# Altium PCB STM32_demo.PcbDoc
Units mil, origin at the board's own origin, x right, y up, seen from the top; angles counter-clockwise.
Board outline 2200 x 1030 mil, 2 copper layers (Top Layer, Bottom Layer); 35 components, 50 nets, 171 pads, 34 vias.
Unrouted connection lines stored in the file: 1.
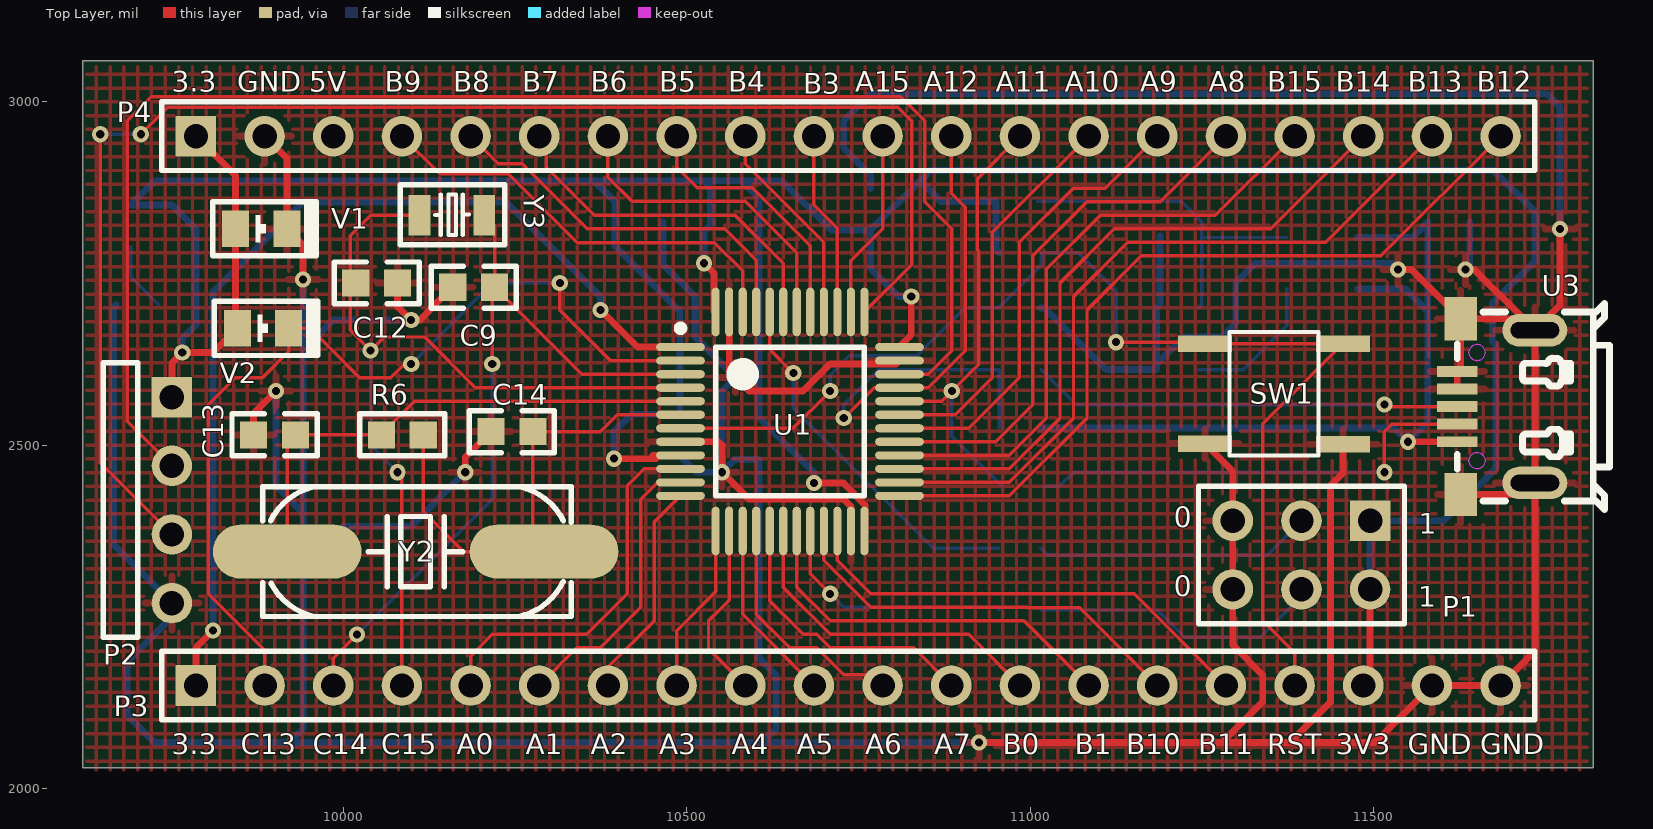
[diagram p0: Top Layer view]
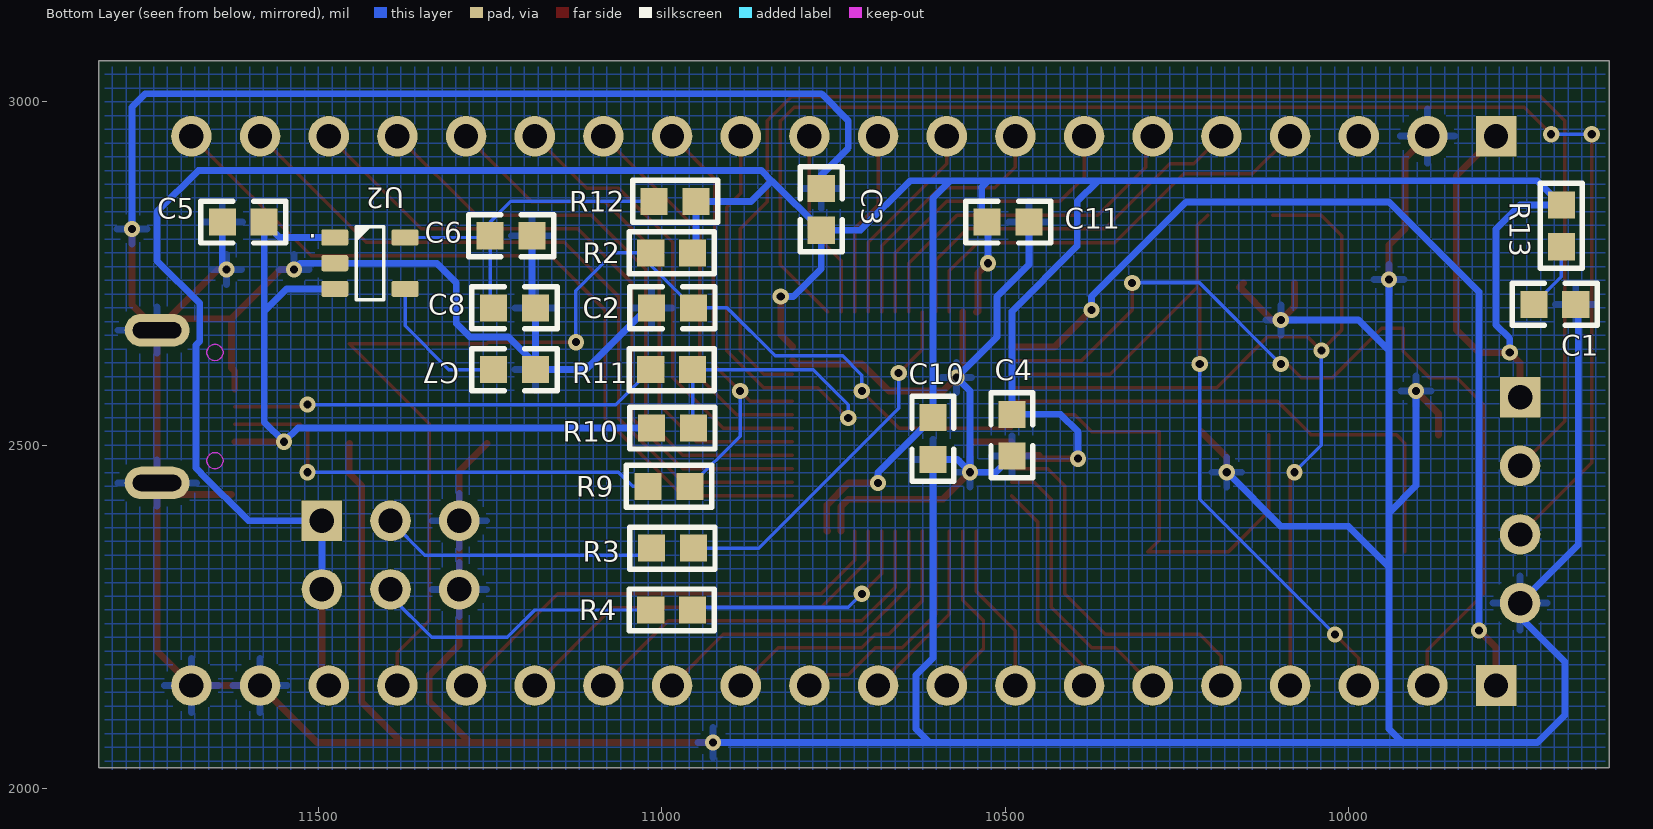
[diagram p1: Bottom Layer view, seen from below]
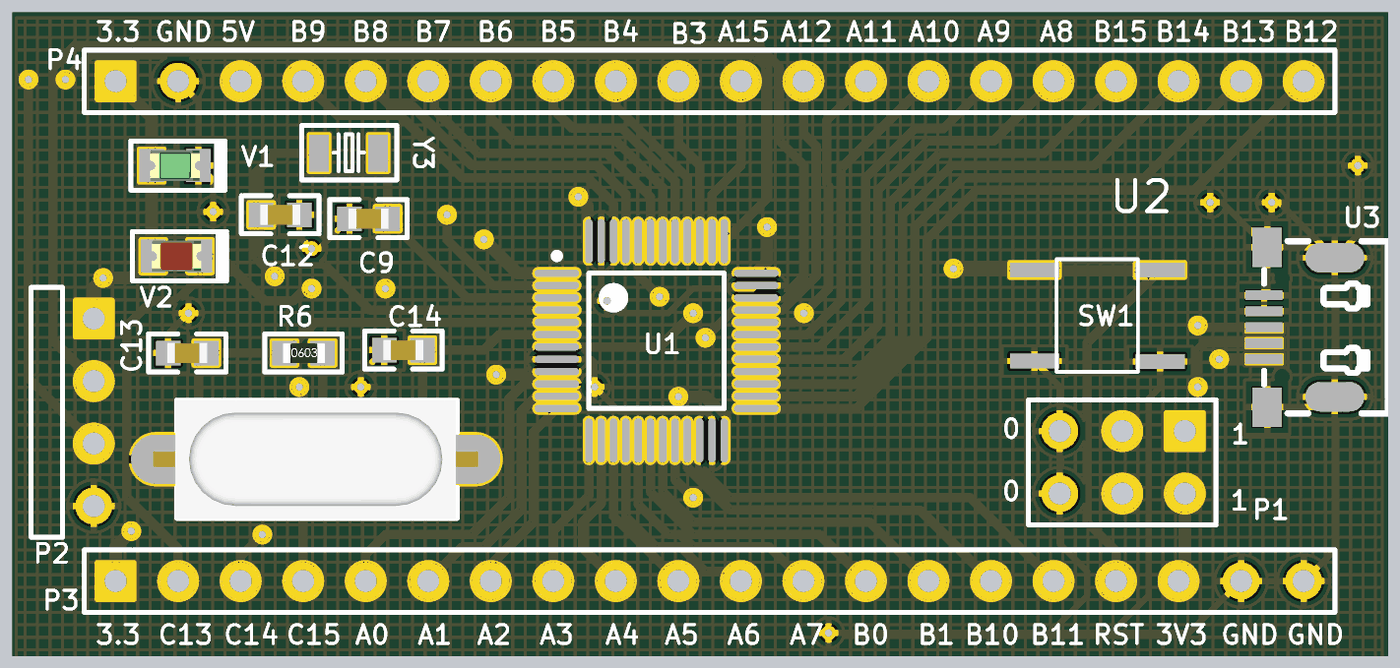
[diagram p2: 3D render of the assembled board from above, using the file's embedded part models]
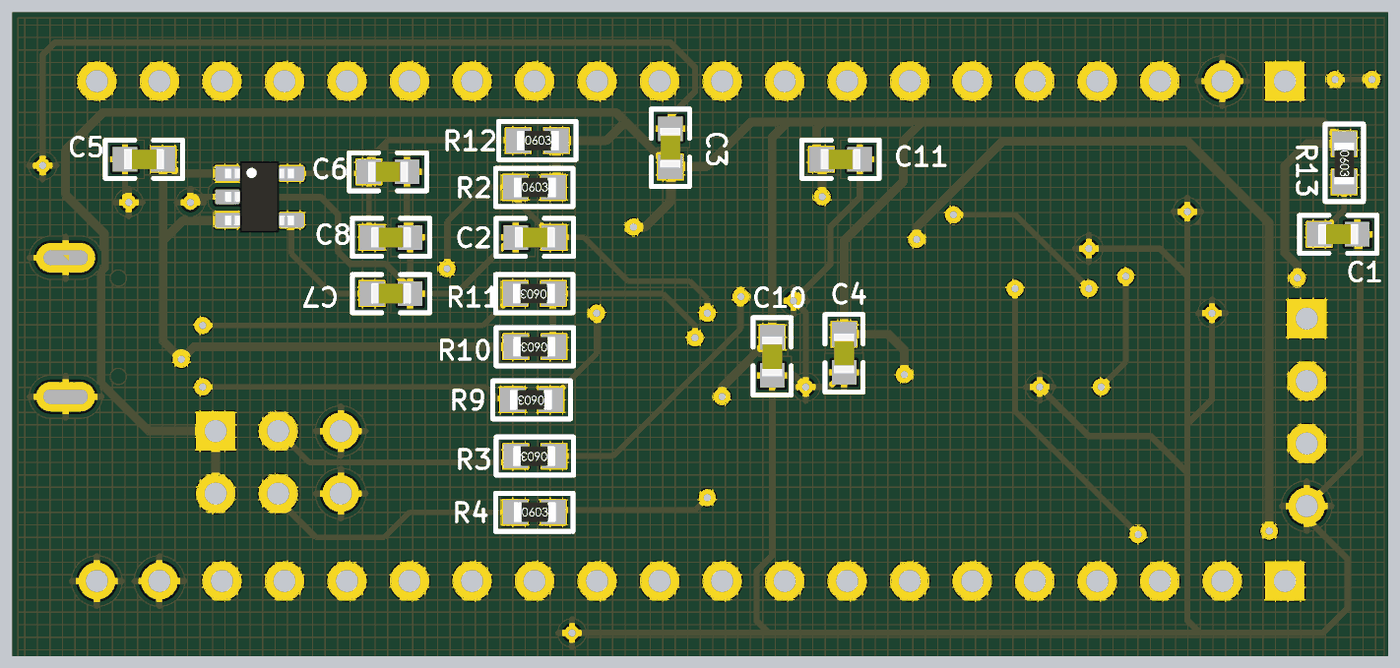
[diagram p3: 3D render of the assembled board from below, using the file's embedded part models]

## Layer stack, top to bottom
Top Solder: solder mask 0.4, Solder Resist, Dk 3.5
Top Layer: signal copper 1.4
Dielectric 1: dielectric 12.6, FR-4, Dk 4.8
Bottom Layer: signal copper 1.4
Bottom Solder: solder mask 0.4, Solder Resist, Dk 3.5

## Board outline
9620,2030 11820,2030 11820,3060 9620,3060

## Design rules (kind name [scope] priority, off if disabled: settings)
Clearance [IsPad vs OnLayer('Keep-Out Layer')] p1: gap=5
HoleSize [IsVia] p1: absolutevalues=TRUE maxlimit=23.62 minlimit=11.81 maxpercent=80.000 minpercent=20.000
MinimumSolderMaskSliver [InPadClass('All Pads') vs OnLayer('Keep-Out Layer')] p1: minsoldermaskwidth=10
PolygonConnect [All] p1: connectstyle=Relief reliefconductorwidth=10 reliefentries=4 polygonreliefangle="90 Angle" airgapwidth=10
RoutingVias [All] p1: holewidth=11.81 width=23.62 viastyle="Through Hole" minholewidth=11.81 minwidth=23.62 maxholewidth=11.81 maxwidth=23.62
SilkToSilkClearance [All] p1: silktosilkclearance=0
SilkToSolderMaskClearance SilkToSolderMaskClearance_1 [IsPad vs OnLayer('Top Layer')] p1: minsilkscreentomaskgap=5 clearancetoexposedcopper=TRUE
SolderMaskExpansion [All] p1: expansion=4
Width Width_5v [InNet('5V')] p1: maxlimit=10 minlimit=10 preferedwidth=10
Width Width_GND [InNet('GND')] p2: maxlimit=10 minlimit=10 preferedwidth=10
Width Width_vcc [InNet('VCC3V3')] p3: maxlimit=10 minlimit=10 preferedwidth=10
Width vbat [InNet('VBAT')] p4: maxlimit=10 minlimit=10 preferedwidth=10
Width Width_data [All] p5: maxlimit=5 minlimit=5 preferedwidth=5
26 further rules are at their usual default settings.

## Classes and differential pairs
component class STM32_demo: C1 C2 C3 C4 C5 C6 C7 C8 C9 C10 C11 C12 C13 C14 P2 P3 P4 R2 R3 R4 R6 R9 R10 R11 R12 R13 SW1 U2 U3 V1 V2 Y2 Y3

## Components (designator, comment, footprint, x,y, rotation, side; value= is the part's Value field where it differs from the comment)
C1 "104,0603" C0603 9699.49,2705 r0 bottom
C2 "105,0603" C0603 10984.49,2700 r180 bottom
C3 "104,0603" C0603 10767.72,2843.5 r270 bottom
C4 "104,0603" C0603 10490,2514.49 r90 bottom
C5 "105,0603" C0603 11609.49,2825 r180 bottom
C6 "106,0603" C0603 11219.49,2805 r0 bottom
C7 "223,0603" C0603 11214.49,2610 r0 bottom
C8 "104,0603" C0603 11214.49,2700 r0 bottom
C9 "20p,0603" C0603 10189.49,2730 r180 top
C10 "104,0603" C0603 10605,2509.49 r90 bottom
C11 "104,0603" C0603 10495.51,2825 r0 bottom
C12 "20p,0603" C0603 10048.23,2736.22 r0 top
C13 "20p,0603" C0603 9899.49,2515 r180 top
C14 "20p,0603" C0603 10245.08,2519.68 r180 top
P1 "Header 3X2" HDR2X3 11495,2390 r180 top
P2 "SWD" HDR1X4H 9750,2570 r270 top
P3 "Header 20" HDR1X20 9785,2150 r0 top
P4 "Header 20" HDR1X20 9785,2950 r0 top
R2 "10K,0603" R0603 10985.51,2780 r180 bottom
R3 "10K,0603" R0603 10984.49,2350 r0 bottom
R4 "10K,0603" R0603 10985.51,2260 r180 bottom
R6 "1M,0603" R0603 10085.51,2515 r0 top
R9 "20R,0603" R0603 10989.49,2440 r0 bottom
R10 "4.7k,0603" R0603 10984.49,2525 r0 bottom
R11 "20R,0603" R0603 10985.51,2610 r0 bottom
R12 "0R,0603" R0603 10980.51,2855 r180 bottom
R13 "0R,0603" R0603 9690,2819.49 r270 bottom
SW1 "" KEY-SMT 11355,2575 r0 top
U1 "STM32F103C8T6" 48P 10650.16,2534.45 r0 top
U2 "RT9193" SOT-23-5 11425,2765 r0 bottom
U3 "USB_Micro" micro_usb_jlc 11748.38,2186.38 r90 top
V1 "WZYG0805-DTZ(绿/片式/70mcd)" LED0805-G 9880,2815 r180 top
V2 "FSL-R2210040HR-TNWSD(红/片式/112mcd)" LED0805-R 9882.59,2670 r180 top
Y2 "20MHz-8pF-20ppm/HC49S-SMD/明德亨" XTL-HC49S-SMD-2P 10105,2345 r180 top
Y3 "32.768kHz-12.5pF-20ppm/XTL-3215/CITIZEN(国标RoHS、欧盟RoHS2.0、REACH)" XTL-3215SMD 10157.76,2835 r0 top

## Footprints (in the part's own frame and the unit in brackets; to place one, negate y for a bottom-side part, rotate by r counter-clockwise, add the part's x,y. Pads: shape width x height; smd on the part's side, far side on the other; paste and mask are expansions set on the pad)
48P [mm]
  oval 1.8x0.3 smd: 1(-4.05,2.75) 2(-4.05,2.25) 3(-4.05,1.75) 4(-4.05,1.25) 5(-4.05,0.75) 6(-4.05,0.25) 7(-4.05,-0.25) 8(-4.05,-0.75) 9(-4.05,-1.25) 10(-4.05,-1.75) 11(-4.05,-2.25) 12(-4.05,-2.75) 25(4.05,-2.75) 26(4.05,-2.25) 27(4.05,-1.75) 28(4.05,-1.25) 29(4.05,-0.75) 30(4.05,-0.25) 31(4.05,0.25) 32(4.05,0.75) 33(4.05,1.25) 34(4.05,1.75) 35(4.05,2.25) 36(4.05,2.75)
  oval 0.3x1.8 smd: 13(-2.75,-4.05) 14(-2.25,-4.05) 15(-1.75,-4.05) 16(-1.25,-4.05) 17(-0.75,-4.05) 18(-0.25,-4.05) 19(0.25,-4.05) 20(0.75,-4.05) 21(1.25,-4.05) 22(1.75,-4.05) 23(2.25,-4.05) 24(2.75,-4.05) 37(2.75,4.05) 38(2.25,4.05) 39(1.75,4.05) 40(1.25,4.05) 41(0.75,4.05) 42(0.25,4.05) 43(-0.25,4.05) 44(-0.75,4.05) 45(-1.25,4.05) 46(-1.75,4.05) 47(-2.25,4.05) 48(-2.75,4.05)
  silkscreen extent -4.17,-2.75 2.75,3.57, body extent -3.5,-3.5 3.5,3.5, height 1.6
C0603 [mm]
  rect 1x1 smd: 1(-0.775,0) 2(0.775,0)
  silkscreen extent -1.58,-0.78 1.57,0.78, body extent -0.81,-0.41 0.81,0.41, height 0.46
HDR1X4H [mm] "Connector; Header; 4 Position; Right Angle"
  rect 1.5x1.5 hole 0.9: 1(0,0)
  round 1.5 hole 0.9: 2(2.54,0) 3(5.08,0) 4(7.62,0)
  silkscreen extent -1.27,-2.54 8.89,-1.27
HDR1X20 [mm] "Connector; Header; 20 Position"
  rect 1.5x1.5 hole 0.9: 1(0,0)
  round 1.5 hole 0.9: 2(2.54,0) 3(5.08,0) 4(7.62,0) 5(10.16,0) 6(12.7,0) 7(15.24,0) 8(17.78,0) 9(20.32,0) 10(22.86,0) 11(25.4,0) 12(27.94,0) 13(30.48,0) 14(33.02,0) 15(35.56,0) 16(38.1,0) 17(40.64,0) 18(43.18,0) 19(45.72,0) 20(48.26,0)
  silkscreen extent -1.27,-1.27 49.53,1.27
HDR2X3 [mm] "Connector; Header; 3x2 Position"
  rect 1.5x1.5 hole 0.9: 1(0,0)
  round 1.5 hole 0.9: 2(0,2.54) 3(2.54,0) 4(2.54,2.54) 5(5.08,0) 6(5.08,2.54)
  silkscreen extent -1.27,-1.27 6.35,3.81
KEY-SMT [mm]
  rect 2x0.6 smd: 1(-2.55,-1.85) 1(2.55,-1.87) 2(-2.55,1.85) 2(2.55,1.85)
  silkscreen extent -1.65,-2.29 1.65,2.29
LED0805-G [mm]
  rect 1x1.35 smd: A(0.95,0) K(-0.95,0)
  silkscreen extent -2.03,-1 1.8,1, body extent -1.01,-0.63 1.01,0.62, height 1.1
LED0805-R [mm]
  rect 1x1.35 smd: A(0.95,0) K(-0.95,0)
  silkscreen extent -2.03,-1 1.8,1, body extent -1.01,-0.63 1.01,0.62, height 1.1
micro_usb_jlc [mm]
  rect 0.4x1.5 smd paste-100 mask+0.051: 1(8.094,3.215) 2(8.744,3.215) 3(9.394,3.215) 4(10.045,3.215) 5(10.695,3.215)
  rect 1.6x1.2 smd paste-100 mask+0.051: 6(6.144,3.09) 7(12.644,3.09)
  oval 1.2x2.4 hole 0.6 slot 1.8 at 90 deg paste+0.051: 8(6.569,0.34) 9(12.219,0.34)
  Keep-Out Layer circle w0.003: c7.394,2.481 r0.3
  Keep-Out Layer circle w0.003: c11.394,2.481 r0.3
  Keep-Out Layer region: 7.694,2.481 7.664,2.35 7.581,2.246 7.461,2.188 7.327,2.188 7.207,2.246 7.124,2.35 7.094,2.481 7.094,2.481 7.124,2.611 7.207,2.715 7.327,2.773 7.461,2.773 7.581,2.715 7.664,2.611 7.694,2.481
  Keep-Out Layer region: 7.694,2.481 7.664,2.35 7.581,2.246 7.461,2.188 7.327,2.188 7.207,2.246 7.124,2.35 7.094,2.481 7.094,2.481 7.124,2.611 7.207,2.715 7.327,2.773 7.461,2.773 7.581,2.715 7.664,2.611 7.694,2.481
  Keep-Out Layer region: 11.694,2.481 11.664,2.35 11.581,2.246 11.461,2.188 11.327,2.188 11.207,2.246 11.124,2.35 11.094,2.481 11.094,2.481 11.124,2.611 11.207,2.715 11.327,2.773 11.461,2.773 11.581,2.715 11.664,2.611 11.694,2.481
  Keep-Out Layer region: 11.694,2.481 11.664,2.35 11.581,2.246 11.461,2.188 11.327,2.188 11.207,2.246 11.124,2.35 11.094,2.481 11.094,2.481 11.124,2.611 11.207,2.715 11.327,2.773 11.461,2.773 11.581,2.715 11.664,2.611 11.694,2.481
  silkscreen extent 5.58,-2.41 13.2,3.22
R0603 [mm]
  rect 1x1 smd: 1(-0.775,0) 2(0.775,0)
  silkscreen extent -1.58,-0.78 1.58,0.78, body extent -0.82,-0.4 0.88,0.4, height 0.56
SOT-23-5 [mm]
  round 0.5 on Mech15: 0(0,0)
  rrect25% 1x0.6 smd: 1(1.3,-0.95) 2(1.3,0) 3(1.3,0.95) 4(-1.3,0.95) 5(-1.3,-0.95)
  silkscreen extent -0.51,-1.35 0.51,1.35, body extent -1.4,-1.45 1.4,1.45, height 1.44
XTL-3215SMD [mm]
  rect 0.8x1.5 smd: 1(-1.2,0) 2(1.2,0)
  silkscreen extent -1.9,-1.09 1.96,1.12
XTL-HC49S-SMD-2P [mm]
  oval 5.5x2 smd: 1(-4.75,0) 2(4.75,0)
  silkscreen extent -5.75,-2.4 5.65,2.4, body extent -6.6,-2.4 6.6,2.4, height 4.3

## Part data
C1 C2 C3 C4 C5 C6 C7 C8 C9 C10 C11 C12 C13 C14: library part Cap, "Capacitor"
P1: "Header, 3-Pin, Dual row"
P2: library part "Header 4", "Header, 4-Pin"
P3 P4: "Header, 20-Pin"
R2 R3 R4 R6 R9 R10 R11 R12 R13: library part Res2, "Resistor"
SW1: library part SW-PB_V, "SWITCH"
U2: library part RT9193X_5P
U3: library part micro_usb
V1: library part 3041000169
V2: library part 3040110122
Y2: library part 3060110011
Y3: library part 3061000009

## Via types
v1: diameter 23.62, hole 11.81, Top Layer to Bottom Layer, 34 vias

## Nets (pads, with @x,y where several pads share a name; then routed paths per layer and width w, separated by ;. In a path a pad name is that pad's centre, name@x,y a point inside that pad or via, vN(x,y) a via of type N, cw(c..) or ccw(c..) an arc to the next point about the centre after c; other vN are vias at no path point)
5V: C5.2 P4.3 R10.2 U2.1 U2.3 U3.1 | length 1175.5
  Top Layer w10: v1(11550,2505) U3.1
  Bottom Layer w10: R10.2 11530,2525 v1(11550,2505) 11578.98,2533.98 11578.98,2695 ; U2.3 11546.38,2727.6 11578.98,2695 ; U2.1 11556.38,2802.4 C5.2 11578.98,2695
BOOT0: R3.1 U1.44 | length 537.8
  Top Layer w5: U1.44 10620.63,2639.37 v1(10655,2605)
  Bottom Layer w5: v1(10655,2605) 10655,2553.66 10858.66,2350 R3.1
BOOT1: R4.2 U1.20 | length 359.6
  Top Layer w5: U1.20 10679.69,2312.44 v1(10708.66,2283.46)
  Bottom Layer w5: v1(10708.66,2283.46) 10728.35,2263.78 10951.22,2263.78 R4.2
GND: C1.1 C2.1 C3.1 C4.1 C5.1 C6.1 C7.1 C8.1 C9.2 C10.1 C11.1 C12.2 C13.2 C14.2 P1.5 P1.6 P2.4 P3.19 P3.20 P4.2 SW1.1 U1.8 U1.23 U1.35 U1.47 U2.2 U3.4 U3.5 U3.6 U3.7 U3.8 U3.9 V1.K | length 10800.9
  Top Layer w10: C13.2 9868.98,2546.14 v1(9901.57,2578.74) ; P4.2 9917.41,2917.59 V1.K 9940.94,2791.47 v1(9940.94,2741.17) ; C12.2 10078.74,2701.8 v1(10098.43,2682.12) 10111.09,2682.12 C9.2 C9.2@10152.76,2736.22 ; v1(10177.17,2460.63) 10177.17,2482.28 C14.2 ; U1.8 10546.26,2504.92 10551.18,2500 v1(10551.18,2460.63) 10590.55,2421.26 10728.35,2421.26 10738.74,2410.87 U1.23 ; U1.47 10561.57,2607.72 v1(10570.87,2598.43) 10590.55,2578.74 10669.29,2578.74 10708.66,2618.11 10804.68,2618.11 U1.35 ; v1(10925.2,2066.93) 11279.53,2066.93 ; SW1.1@11254.61,2502.17 11295,2461.77 P1.5 P1.6 11295,2208.94 11338.58,2165.35 11338.58,2125.98 11279.53,2066.93 ; SW1.1@11454.61,2502.17 11455.39,2501.38 11455.39,2459.33 11437.01,2440.94 11437.01,2125.98 11377.95,2066.93 ; v1(11535.43,2755.91) 11554.99,2755.91 U3.7 ; U3.4 U3.5 11626.73,2612.36 U3.7 ; U3.6 11718.27,2428.27 U3.8 ; v1(11633.86,2755.91) 11646.53,2755.91 U3.9@11718.27,2684.17 ; v1(11771.65,2814.96) 11771.65,2704.09 U3.9 ; 11279.53,2066.93 11377.95,2066.93 ; 11377.95,2066.93 11501.93,2066.93 P3.19 P3.20 11735,2200 U3.8 ; U3.7 U3.9@11718.27,2684.17 ; U3.9@11718.27,2684.17 U3.9 ; U3.8 U3.9
  Bottom Layer w10: C1.1 9665.35,2701.38 9665.35,2354.65 P2.4 9750,2250 9685.04,2185.04 9685.04,2106.3 9724.41,2066.93 9921.26,2066.93 ; v1(9901.57,2578.74) 9901.57,2440.94 9940.94,2401.57 ; v1(9940.94,2741.17) 9940.94,2637.8 ; v1(10098.43,2682.12) 9985.27,2682.12 9940.94,2637.8 ; v1(10177.17,2460.63) 10098.43,2381.89 10000,2381.89 9940.94,2322.83 ; C11.1 10465,2763.35 10511.81,2716.54 10511.81,2657.48 v1(10570.87,2598.43) 10551.18,2578.74 v1(10551.18,2460.63) ; C4.1 10513.35,2460.63 v1(10551.18,2460.63) ; C3.1 10767.72,2893.7 10728.35,2933.07 10728.35,2972.44 10767.72,3011.81 11751.97,3011.81 11771.65,2992.13 v1(11771.65,2814.96) ; v1(10925.2,2066.93) 10610.24,2066.93 ; C2.1 11020.47,2700 11110.47,2610 C7.1 C7.1@11183.98,2618.11 ; C6.1 11188.98,2705 C8.1 C7.1@11183.98,2618.11 ; v1(11535.43,2755.91) 11526.34,2765 U2.2 11327.99,2765 11299.21,2736.22 11299.21,2677.17 11279.53,2657.48 11223.35,2657.48 C7.1@11183.98,2618.11 ; v1(11633.86,2755.91) 11640,2762.05 C5.1 ; 9921.26,2066.93 10610.24,2066.93 ; 9921.26,2066.93 9940.94,2086.61 9940.94,2322.83 ; 9940.94,2322.83 9940.94,2401.57 ; 9940.94,2401.57 9940.94,2637.8 ; v1(10551.18,2460.63) 10569.53,2478.98 C10.1 10605,2190.28 10629.92,2165.35 10629.92,2086.61 10610.24,2066.93
NetC1_2: C1.2 R13.2 | length 100.5
  Bottom Layer w5: R13.2 9690,2745 C1.2
NetC6_2: C6.2 C8.2 R12.1 U2.5 | length 503.4
  Bottom Layer w5: R12.1 11220,2855 11250,2825 C6.2 ; C8.2 11250,2705 C6.2 ; U2.5 11252.6,2802.4 C6.2
NetC7_2: C7.2 U2.4 | length 209
  Bottom Layer w5: C7.2 11310,2610 11373.82,2673.82 U2.4
NetP1_3: P1.3 R3.2 | length 404.9
  Bottom Layer w5: R3.2 11025,2340 11345,2340 P1.3
NetP1_4: P1.4 R4.1 | length 430.4
  Bottom Layer w5: R4.1 11185,2260 11225,2220 11335,2220 11395,2280 P1.4
NetR9_2: R9.2 U3.2 | length 673.9
  Top Layer w5: v1(11515.75,2460.63) 11515.75,2519.68 11526.7,2530.64 U3.2
  Bottom Layer w5: R9.2 11042.36,2440 11062.99,2460.63 v1(11515.75,2460.63)
NetR11_2: R11.2 U3.3 | length 628.1
  Top Layer w5: v1(11515.75,2559.06) 11518.56,2556.24 U3.3
  Bottom Layer w5: R11.2 11066.97,2559.06 v1(11515.75,2559.06)
OSCIN: C13.1 R6.1 U1.5 Y2.2 | length 756.3
  Top Layer w5: Y2.2 9917.99,2502.99 C13.1 R6.1 10055,2515.63 10103.35,2563.98 U1.5
OSCOUT: C14.1 R6.2 U1.6 Y2.1 | length 718.4
  Top Layer w5: R6.2 10116.02,2403.66 10174.68,2345 Y2.1 10275.59,2361.42 C14.1 10374.02,2519.68 10398.62,2544.29 U1.6
PA0: P3.5 U1.10 | length 553.8
  Top Layer w5: P3.5 10185,2192.87 10216.54,2224.41 10354.33,2224.41 10413.39,2283.46 10413.39,2440.94 10437.99,2465.55 U1.10
PA1: P3.6 U1.11 | length 420.5
  Top Layer w5: P3.6 10339.72,2204.72 10374.02,2204.72 10433.07,2263.78 10433.07,2421.26 10457.68,2445.87 U1.11
PA2: P3.7 U1.12 | length 320
  Top Layer w5: P3.7 10385,2176.34 10452.76,2244.09 10452.76,2388.23 U1.12
PA3: P3.8 U1.13 | length 248.6
  Top Layer w5: P3.8 10485,2230 10541.89,2286.89 U1.13
PA4: P3.9 U1.14 | length 259.6
  Top Layer w5: U1.14 10561.57,2274.17 10531.5,2244.09 10531.5,2203.5 P3.9
PA5: P3.10 U1.15 | length 268
  Top Layer w5: U1.15 10581.26,2253.74 P3.10
PA6: P3.11 U1.16 | length 373.5
  Top Layer w5: U1.16 10600.94,2253.39 10649.61,2204.72 10688.98,2204.72 10728.35,2165.35 10769.65,2165.35 P3.11 P3.11@10760,2150
PA7: P3.12 U1.17 | length 440.5
  Top Layer w5: U1.17 10620.63,2273.07 10669.29,2224.41 10688.98,2224.41 10708.66,2204.72 10830.28,2204.72 P3.12 P3.12@10861.81,2150
PA8: P4.16 U1.29 | length 786.6
  Top Layer w5: U1.29 10949.8,2504.92 11003.94,2559.06 11003.94,2775.59 11082.68,2854.33 11189.33,2854.33 P4.16
PA9: P4.15 U1.30 | length 666.9
  Top Layer w5: U1.30 10910.43,2524.61 10984.25,2598.43 10984.25,2795.28 11062.99,2874.02 11109.02,2874.02 P4.15
PA10: P4.14 U1.31 | length 567.3
  Top Layer w5: U1.31 10890.75,2544.29 10944.88,2598.43 10944.88,2809.88 P4.14
PA11: P4.13 R9.1 U1.32 | length 665.9
  Top Layer w5: U1.32 10871.06,2563.98 v1(10885.83,2578.74) 10925.2,2618.11 10925.2,2782.81 10922.52,2785.48 10922.52,2887.52 P4.13
  Bottom Layer w5: v1(10885.83,2578.74) 10885.83,2513.15 R9.1
PA12: P4.12 R10.1 R11.1 U1.33 | length 891.5
  Top Layer w5: v1(10728.35,2539.37) 10772.64,2583.66 U1.33 10851.38,2583.66 10905.51,2637.8 10905.51,2846.31 10885,2866.82 P4.12
  Bottom Layer w5: v1(10728.35,2539.37) 10728.35,2559.06 10779.29,2610 R11.1 10955,2526.02 R10.1
PA15: P4.11 U1.38 | length 275.3
  Top Layer w5: U1.38 10738.74,2768.74 10785,2815 P4.11
PB0: P3.13 U1.18 | length 486.1
  Top Layer w5: U1.18 10640.32,2292.75 10708.66,2224.41 10910.59,2224.41 P3.13
PB1: P3.14 U1.19 | length 566.4
  Top Layer w5: U1.19 10660,2292.76 10708.66,2244.09 10990.91,2244.09 P3.14
PB3: P4.10 U1.39 | length 270.2
  Top Layer w5: P4.10 10685,2850 10719.06,2815.94 U1.39
PB4: P4.9 U1.40 | length 303.5
  Top Layer w5: P4.9 10585,2910 10699.37,2795.63 U1.40
PB5: P4.8 U1.41 | length 383.6
  Top Layer w5: P4.8 10485,2905 10515,2875 10595,2875 10679.69,2790.31 U1.41
PB6: P4.7 U1.42 | length 466.7
  Top Layer w5: P4.7 10385,2890 10420,2855 10585,2855 10660,2780 U1.42
PB7: P4.6 U1.43 | length 523.4
  Top Layer w5: P4.6 10295,2940 10295,2905 10365,2835 10570,2835 10640.32,2764.69 U1.43
PB8: P4.5 U1.45 | length 566.1
  Top Layer w5: P4.5 10225,2910 10260,2910 10355,2815 10555,2815 10600.94,2769.06 U1.45
PB9: P4.4 U1.46 | length 637.4
  Top Layer w5: P4.4 10140,2895 10240,2895 10340,2795 10540,2795 10581.26,2753.74 U1.46
PB10: P3.15 U1.21 | length 603.9
  Top Layer w5: U1.21 10699.37,2332.13 10767.72,2263.78 10995.34,2263.78 10996.06,2263.06 11071.94,2263.06 P3.15
PB11: P3.16 U1.22 | length 684.3
  Top Layer w5: U1.22 10719.06,2332.13 10767.72,2283.46 11151.54,2283.46 P3.16
PB12: P4.20 U1.25 | length 1184.6
  Top Layer w5: U1.25 10969.49,2426.18 11082.68,2539.37 11082.68,2696.85 11161.42,2775.59 11510.59,2775.59 P4.20
PB13: P4.19 U1.26 | length 1088
  Top Layer w5: U1.26 10969.49,2445.87 11062.99,2539.37 11062.99,2716.54 11141.73,2795.28 11430.28,2795.28 P4.19
PB14: P4.18 U1.27 | length 991.4
  Top Layer w5: U1.27 10969.49,2465.55 11043.31,2539.37 11043.31,2736.22 11122.05,2814.96 11349.96,2814.96 P4.18
PB15: P4.17 U1.28 | length 894.7
  Top Layer w5: U1.28 10969.49,2485.24 11023.62,2539.37 11023.62,2755.91 11102.36,2834.65 11269.65,2834.65 P4.17
PC13: P3.2 U1.2 V2.K | length 1354.3
  Top Layer w5: P3.2@9881.89,2153.11 P3.2 9885,2201.61 9803.15,2283.46 9803.15,2559.06 9842.52,2598.43 9881.89,2598.43 9920,2636.54 V2.K 9951.63,2670 9983.27,2638.37 10023.21,2598.43 10068.9,2598.43 v1@10093.5,2623.03 ; v1(10314.96,2736.22) 10314.96,2696.85 10388.78,2623.03 U1.2
  Bottom Layer w5: v1(10098.43,2618.11) 10216.54,2736.22 v1(10314.96,2736.22)
PC14: C9.1 P3.3 U1.3 Y3.2 | length 1111.7
  Top Layer w5: P3.3 9985,2189.72 v1(10019.68,2224.41) ; Y3.2 10220,2820 C9.1 ; v1(10216.54,2618.11) 10216.54,2726.54 C9.1 ; U1.3 10346.65,2603.35 C9.1
  Bottom Layer w5: v1(10019.68,2224.41) 10216.54,2421.26 v1(10216.54,2618.11)
PC15: C12.1 P3.4 U1.4 Y3.1 | length 1289.7
  Top Layer w5: v1(10078.74,2460.63) 10085,2454.37 P3.4 ; Y3.1 10039.72,2835 10009.49,2804.76 10009.49,2667.68 v1(10039.37,2637.8) 10059.06,2657.48 10118.11,2657.48 10191.93,2583.66 U1.4
  Bottom Layer w5: v1(10039.37,2637.8) 10039.37,2500 v1(10078.74,2460.63)
RESET: C2.2 P3.17 R2.1 SW1.2 U1.7 | length 1758.7
  Top Layer w5: U1.7 10654.53,2524.61 v1(10708.66,2578.74) ; v1(11125,2650) 11252.44,2650 11254.61,2647.83 11455.39,2647.83 11338.58,2531.02 11338.58,2244.09 11385,2197.68 P3.17
  Bottom Layer w5: v1(10708.66,2578.74) 10708.66,2601.95 10736.72,2630 10835,2630 10905,2700 C2.2 11016.02,2762.05 R2.1 11070,2780 11125,2725 v1(11125,2650)
SWCLK: P2.3 U1.37 | length 2139.4
  Top Layer w5: v1(9645.67,2952.76) 9645.67,2474.33 P2.3 ; v1(9704.72,2952.76) 9744.09,2992.13 10807.09,2992.13 10826.77,2972.44 10827.48,2972.44 10827.48,2762.95 U1.37
  Bottom Layer w5: v1(9645.67,2952.76) v1(9704.72,2952.76)
SWIO: P2.2 U1.34 | length 2161.3
  Top Layer w5: P2.2 9685.04,2534.96 9685.04,2972.44 9720.1,3007.5 10811.4,3007.5 10846.46,2972.44 10846.46,2854.33 10885.83,2814.96 10885.83,2637.8 10851.38,2603.35 U1.34
VBAT: P3.1 U1.1 | length 1419.1
  Top Layer w10: P3.1 9785,2205 v1(9810,2230) ; v1(10374.02,2696.85) 10428.15,2642.72 U1.1 U1.1@10490.71,2643.94
  Bottom Layer w10: v1(9810,2230) 9810,2723.39 9940.94,2854.33 10236.22,2854.33 10374.02,2716.54 v1(10374.02,2696.85)
VCC3V3: C3.2 C4.2 C10.2 C11.2 P1.1 P1.2 P2.1 P3.18 P4.1 R2.2 R12.2 R13.1 U1.9 U1.24 U1.36 U1.48 V1.A V2.A | length 5653
  Top Layer w10: P2.1 9750,2620 v1(9765,2635) 9809.83,2635 9842.61,2667.78 V1.A 9842.61,2892.39 P4.1 ; v1(10393.7,2480.32) 10455.16,2480.32 10450.24,2485.24 U1.9 ; v1(10525,2765) 10539.57,2750.43 10539.57,2695 10540.67,2693.9 U1.48 ; v1(10685,2445) 10727.83,2445 10759.65,2413.19 10759.65,2375 U1.24 ; U1.36 10809.61,2643.94 10825,2659.33 10826.77,2661.1 v1(10826.77,2716.54) ; P3.18 11495,2160 P1.2
  Bottom Layer w10: v1(9765,2635) 9765,2655 9785,2675 9785,2815 9750,2850 R13.1 9725,2885 10365,2885 ; v1(10393.7,2480.32) 10393.7,2519.68 10419.02,2545 C4.2 10490,2695 10395,2790 10395,2855 10365,2885 ; v1(10525,2765) 10525,2811.02 10533.98,2820 10533.98,2876.02 10525,2885 ; v1(10685,2445) 10685,2460 C10.2 10605,2860 10580,2885 ; v1(10826.77,2716.54) 10808.46,2716.54 10767.72,2757.28 C3.2 ; R2.2 10950,2785 R12.2 10870,2855 10840,2885 ; P1.2 P1.1 11601.97,2390 11670.89,2458.92 11670.89,2459.27 11678.11,2466.49 11678.11,2646.09 11672.76,2651.44 11672.76,2706.06 11735,2768.3 11735,2840 11675,2900 10855,2900 10840,2885 ; 10365,2885 10525,2885 ; 10525,2885 10580,2885 ; 10580,2885 10638.62,2885 10710.63,2812.99 C3.2 ; C3.2 10839.72,2885 10840,2885
pads on no net: U2.0

## Polygon pours and split planes (outlines as drawn)
GND on Top Layer "GND_L01_P004" (hatched 90Degree grid 20 track 5, pour order 4): 9625.98,3051.18 9625.98,2027.56 11811.02,2027.56 11811.02,3051.18
GND on Bottom Layer "GND_L02_P006" (hatched 90Degree grid 20 track 2, pour order 6): 9625.98,3051.18 9625.98,2027.56 11811.02,2027.56 11811.02,3051.18

## Silkscreen, mask and mechanical layers (free items; w line width, h text height)
Top Overlay:
  text "3.3" at 9750,3015 h30
  text "GND" at 9845,3015 h30
  text "5V" at 9950,3015 h30
  text "B9" at 10060,3015 h30
  text "B8" at 10160,3015 h30
  text "B7" at 10260,3015 h30
  text "B6" at 10360,3015 h30
  text "B5" at 10460,3015 h30
  text "B4" at 10560,3015 h30
  text "A15" at 10745,3015 h30
  text "A12" at 10845,3015 h30
  text "A11" at 10950,3015 h30
  text "A10" at 11050,3015 h30
  text "A9" at 11160,3015 h30
  text "A8" at 11260,3015 h30
  text "B15" at 11345,3015 h30
  text "B14" at 11445,3015 h30
  text "B13" at 11550,3015 h30
  text "B12" at 11650,3015 h30
  text "B3" at 10669.29,3011.81 h30
  text "3.3" at 9750,2050 h30
  text "C13" at 9850,2050 h30
  text "C14" at 9955,2050 h30
  text "C15" at 10055,2050 h30
  text "A0" at 10165,2050 h30
  text "A1" at 10265,2050 h30
  text "A2" at 10360,2050 h30
  text "A3" at 10460,2050 h30
  text "A4" at 10565,2050 h30
  text "A5" at 10660,2050 h30
  text "A6" at 10760,2050 h30
  text "A7" at 10860,2050 h30
  text "B0" at 10960,2050 h30
  text "B1" at 11065,2050 h30
  text "B10" at 11140,2050 h30
  text "B11" at 11245,2050 h30
  text "RST" at 11345,2050 h30
  text "3V3" at 11445,2050 h30
  text "GND" at 11550,2050 h30
  text "GND" at 11655,2050 h30
Mechanical 1:
  the board outline again, w10

## Text inside footprints (layer, text, board x,y; h text height)
P1: Top Overlay "0" at 11235,2310 h30 r180; Top Overlay "0" at 11235,2410 h30 r180; Top Overlay "1" at 11565,2265 h30; Top Overlay "1" at 11566.15,2370.87 h30